# Altium PCB 105358-3LA003-01_EFM1_Touch.PcbDoc
Units mm, origin at the board's own origin, x right, y up, seen from the top; angles counter-clockwise.
Board outline 51.4 x 12.4 mm, 2 copper layers (Component Side, Bottom Layer), stack 1.179 mm thick; 1 components, 1 nets, 1 pads, 3 vias.
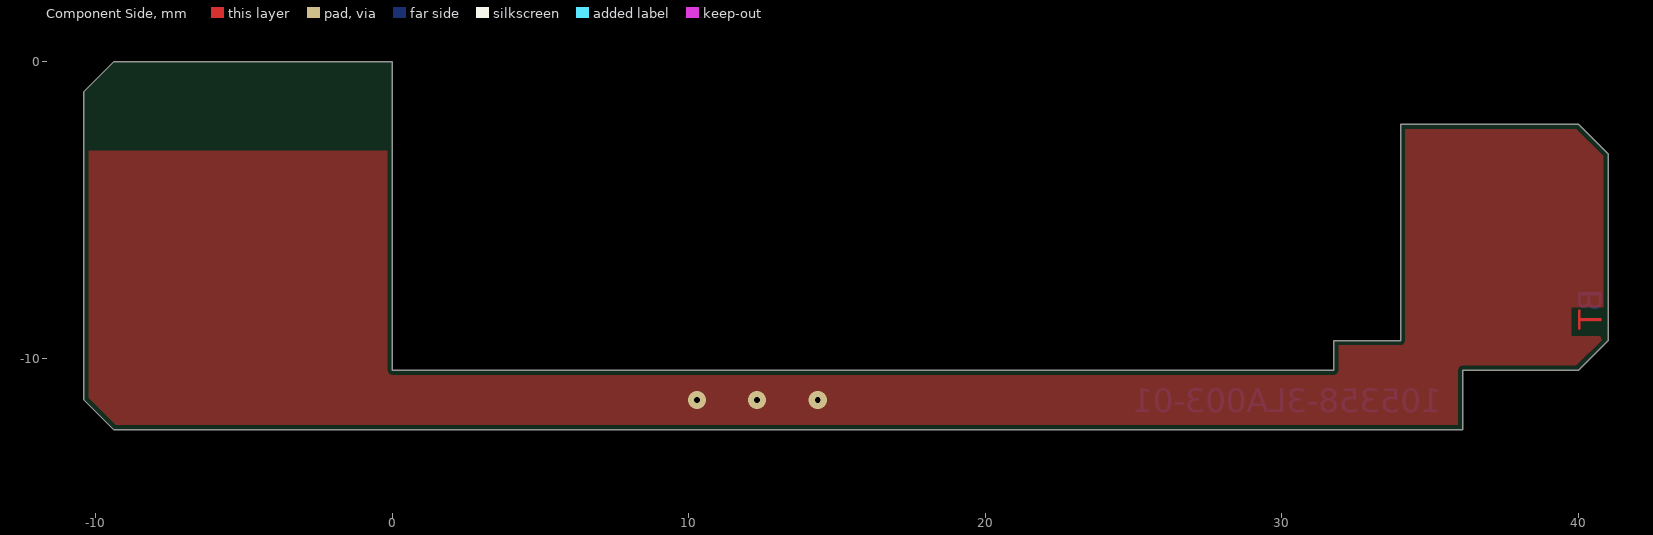
[diagram p0: Component Side view]
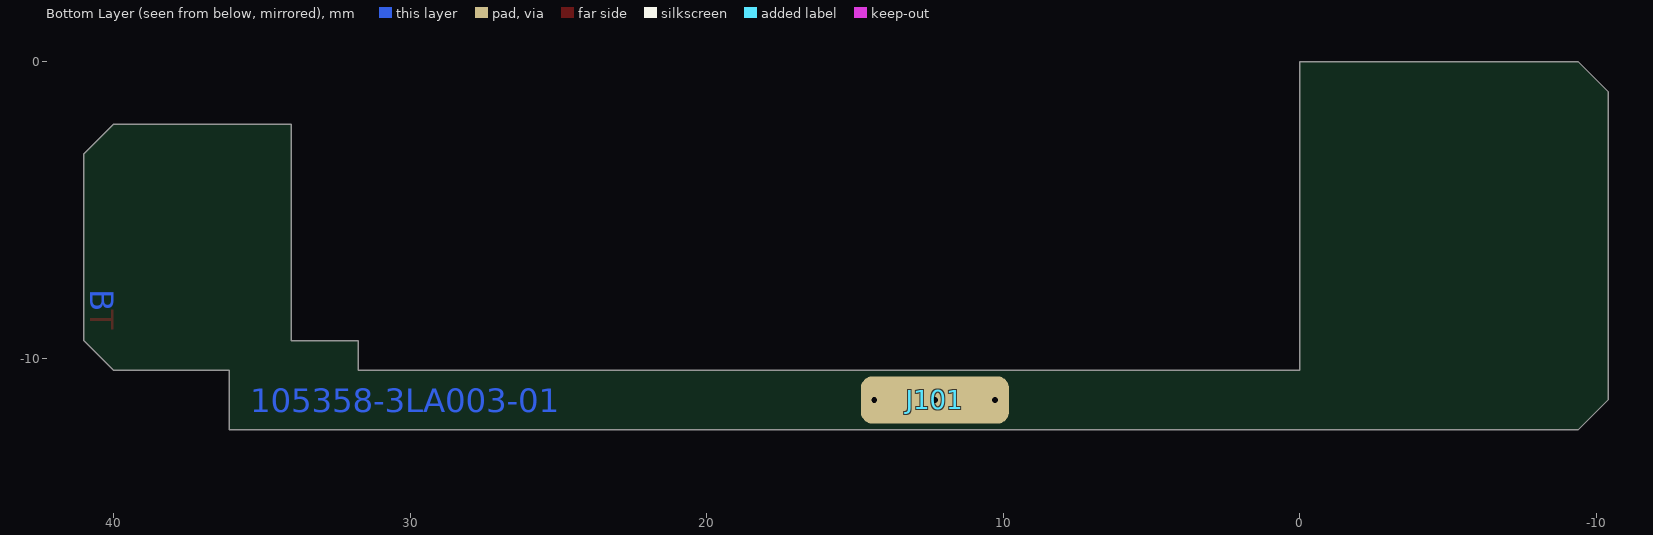
[diagram p1: Bottom Layer view, seen from below]

## Layer stack, top to bottom
Component Side: signal copper 0.0178
Dielectric 1: core 1.143, FR-4, Dk 4.2
Bottom Layer: signal copper 0.0178

## Board outline
36.1,-10.4 40,-10.4 41,-9.4 41,-3.1 40,-2.1 34,-2.1 34,-9.4 31.75,-9.4 31.75,-10.4 0,-10.4 0,0 -9.4,0 -10.4,-1 -10.4,-11.4 -9.4,-12.4 36.1,-12.4

## Design rules (kind name [scope] priority, off if disabled: settings)
AcuteAngle [All] p1: minimum=6.00000000000000E+0001 checktracksonly=FALSE
AssemblyTestpoint [(IsPad And (OnTopLayer Or OnBottomLayer)) Or (IsVia) Or (IsPad And OnMultiLayer)] p1: testpointundercomponent=TRUE minsize=0.8 maxsize=2.5 preferedsize=1 minholesize=0 maxholesize=2 preferedholesize=0.7 testpointgrid=0.025 usegrid=FALSE gridtolerance=0 allowsidebottom=TRUE minspacing=2.54
BoardOutlineClearance [All] p1: gap=0.15 ignorepadtopadclearanceinfootprint=FALSE
Clearance Clearance_FIDU [InComponentClass('FIDU')] p1: gap=0.2 ignorepadtopadclearanceinfootprint=FALSE except(0: Arc-Hole Track-Hole SMDPad-Hole THPad-Hole Via-Hole Fill-Hole Poly-Hole Region-Hole Text-Hole)
Clearance TRX_LINE_CLEARENCE [InNetClass('RF_50_Ohm')] p2: gap=0.4 ignorepadtopadclearanceinfootprint=FALSE except(0: Arc-Hole Track-Hole SMDPad-Hole THPad-Hole Via-Hole Fill-Hole Poly-Hole Region-Hole Text-Hole)
Clearance Clearance_4 [All] p3: gap=0.127 ignorepadtopadclearanceinfootprint=FALSE // All - All
Clearance Clearance_2 [InNetClass('Primary') vs InNetClass('Primary') or InNet('GND')] p4: gap=2.5 ignorepadtopadclearanceinfootprint=FALSE except(0: Arc-Hole Track-Hole SMDPad-Hole THPad-Hole Via-Hole Fill-Hole Poly-Hole Region-Hole Text-Hole) // Primary - Primary
Clearance Clearance_1 [OnLayer('Mid-Layer 1') or OnLayer('Multi-Layer') vs OnLayer('Mid-Layer 1')] p5: gap=0.4 ignorepadtopadclearanceinfootprint=FALSE except(0: Arc-Hole Track-Hole SMDPad-Hole THPad-Hole Via-Hole Fill-Hole Poly-Hole Region-Hole Text-Hole) // Inner Layers
Clearance Clearance_TP [InComponentClass('TP')] p6: gap=0.127 ignorepadtopadclearanceinfootprint=FALSE except(0: Arc-Hole Track-Hole SMDPad-Hole THPad-Hole Via-Hole Fill-Hole Poly-Hole Region-Hole Text-Hole; 0.2: Arc-Arc Arc-Track Arc-SMDPad Arc-THPad Arc-Via Arc-Fill Arc-Poly Arc-Region Track-Track Track-SMDPad Track-THPad Track-Via Track-Fill Track-Poly Track-Region THPad-THPad THPad-Via THPad-Fill THPad-Poly THPad-Region)
ComponentClearance [ALL and not( ( InComponentClass('NET_TIE') or InComponentClass('TP'))OR InComponentClass('FIDU')or InComponentClass('3D_IGNORE')or InComponent('D401'))] p1: gap=0.15 collisioncheckmode=3 verticalgap=0.1 showdistances=TRUE
DiffPairsRouting [All] p1: maxlimit=0.254 minlimit=0.2 mostfreqgap=0.2 toplayer_minwidth=0.127 toplayer_maxwidth=0.381 toplayer_prefwidth=0.2 bottomlayer_minwidth=0.127 bottomlayer_maxwidth=0.381 bottomlayer_prefwidth=0.2 maxuncoupledlength=12.7
FabricationTestPointUsage TestPointUsage [All] p1: valid=0 allowmultiple=FALSE
FabricationTestpoint Testpoint [(IsPad And (OnTopLayer Or OnBottomLayer)) Or (IsVia) Or (IsPad And OnMultiLayer)] p1: side=2 testpointundercomponent=TRUE minsize=0.8 maxsize=2.5 preferedsize=1 minholesize=0 maxholesize=2 preferedholesize=0.7 testpointgrid=2.54 allowsidebottom=TRUE usegrid=TRUE gridoriginx=109.725 gridoriginy=79.23 gridtolerance=0 minspacing=2.54
FanoutControl Fanout_Default [All] p1: bgadir=Out bgaviamode=Centered fanoutstyle=Auto fanoutdirection=Alternating viagrid=0.025 // Fanout_Default (Default Rule)
FanoutControl Fanout_Small [(CompPinCount < 5)] p2: bgadir=Out bgaviamode=Centered fanoutstyle=Auto fanoutdirection=OutThenIn viagrid=0.025 // Fanout_Small (Default Rule)
FanoutControl Fanout_LCC [IsLCC] p4: bgadir=Out bgaviamode=Centered fanoutstyle=Auto fanoutdirection=Alternating viagrid=0.025 // Fanout_LCC (Default Rule)
FanoutControl Fanout_BGA [IsBGA] p5: bgadir=Out bgaviamode=Centered fanoutstyle=Auto fanoutdirection=Alternating viagrid=0.025 // Fanout_BGA (Default Rule)
HoleSize [All] p1: absolutevalues=TRUE maxlimit=3.5 minlimit=0.1 maxpercent=80.000 minpercent=20.000
HoleToHoleClearance [All] p1: gap=0.127 allowstackedmicrovias=TRUE
MinimumAnnularRing MinimumAnnularRing_Uvia1 [InDrillLayerPair('Component Side - Inner Layer 1')] p1: minimumring=0.074
MinimumAnnularRing MinimumAnnularRing_Uvia2 [InDrillLayerPair('Inner Layer 2 - Solder Side')] p2: minimumring=0.074
MinimumAnnularRing MinimumAnnularRing_2 [isPad] p3: minimumring=0.2
MinimumAnnularRing MinimumAnnularRing_1 [isVia] p4: minimumring=0.125
MinimumSolderMaskSliver [All] p1: minsoldermaskwidth=0.06
MinimumSolderMaskSliver SilkscreenOverComponentPads [IsPad] p2: minsoldermaskwidth=0.075
PlaneClearance [All] p1: clearance=0.3
PlaneConnect PlaneConnect_VIA [isVia or HasFootprint('PAD PROGRAMMING')] p1: planeconnectstyle=Direct reliefexpansion=0.508 reliefentries=4 reliefconductorwidth=0.254 reliefairgap=0.254
PlaneConnect [All] p2: planeconnectstyle=Relief reliefexpansion=0.508 reliefentries=4 reliefconductorwidth=0.254 reliefairgap=0.254
PolygonConnect PolygonConnect_NO-Thermal [All vs IsNamedPolygon('NETC303_1_5VIN') or  IsNamedPolygon('Solder Side-VCC_SYS') or IsNamedPolygon('CC-3V_CAPS') or  IsNamedPolygon('Ss-5V_USB_IN_2') or IsNamedPolygon('SS-NetC307_2') or IsNamedPolygon('SS-GND_SB03') or IsNamedPolygon('Component Side-NetC307_2') or IsNamedPolygon('Solder Side-NetJ201_5') or  IsNamedPolygon('Component Side-NetJ201_5')or  IsNamedPolygon('Component Side-BLE_VDD_4')or IsNamedPolygon('SS-BLE_VDD_4')or IsNamedPolygon('SS-GND_9VRED')] p1: connectstyle=Direct reliefconductorwidth=0.254 reliefentries=4 polygonreliefangle="90 Angle" airgapwidth=0.254
PolygonConnect PolygonConnect_VIA [IsVia] p2: connectstyle=Direct reliefconductorwidth=0.254 reliefentries=4 polygonreliefangle="90 Angle" airgapwidth=0.254
PolygonConnect NET_TIE [InComponentClass('NET_TIE')] p3: connectstyle=Direct reliefconductorwidth=0.254 reliefentries=4 polygonreliefangle="90 Angle" airgapwidth=0.254
PolygonConnect PolygonConnect_TP_I [HasFootprint('TESTPOINT_C_R0608')or HasFootprint('TESTPOINT_C_R0402')OR HasFootprint('PAD PROGRAMMING')] p4: connectstyle=Direct reliefconductorwidth=0.254 reliefentries=4 polygonreliefangle="90 Angle" airgapwidth=0.254
PolygonConnect [All] p5: connectstyle=Relief reliefconductorwidth=0.254 reliefentries=4 polygonreliefangle="90 Angle" airgapwidth=0.254
RoutingVias [((StartLayer = 'Component Side') and (StopLayer = 'Solder Side' )) or ((StartLayer = 'Solder Side') and (StopLayer = 'Component Side' ))] p1: holewidth=0.15 width=0.401 viastyle="Through Hole" minholewidth=0.15 minwidth=0.4 maxholewidth=0.2 maxwidth=0.61
RoutingVias Microvia [((StartLayer = 'Component Side') and (StopLayer = 'Inner Layer 1' )) or  ((StartLayer = 'Inner Layer 2'  ) and (StopLayer = 'Solder Side')) or ((StartLayer = 'Inner Layer 1') and (StopLayer = 'Component Side'  )) or ((StartLayer = 'Solder Side' ) and (StopLayer = 'Inner Layer 2'))] p2: holewidth=0.1 width=0.31 viastyle="Through Hole" minholewidth=0.1 minwidth=0.25 maxholewidth=0.15 maxwidth=0.45
RoutingVias BuriedVia [((StartLayer = 'Inner Layer 1') and (StopLayer = 'Inner Layer 2' )) or  ((StartLayer = 'Inner Layer 2') and (StopLayer = 'Inner Layer 1' ))] p3: holewidth=0.15 width=0.401 viastyle="Through Hole" minholewidth=0.15 minwidth=0.401 maxholewidth=0.2 maxwidth=0.61
SilkToSilkClearance [All] p1: silktosilkclearance=0
SilkToSolderMaskClearance SilkscreenOverComponentPads_1 [IsPad] p1: minsilkscreentomaskgap=0 clearancetoexposedcopper=TRUE
SolderMaskExpansion SolderMaskExpansion_2 [All] p1: expansion=0.1
SolderMaskExpansion SolderMaskExpansion_1 [isVia And Not TestpointBottom] p2: expansion=-0.508
Width [All] p1: maxlimit=5 minlimit=0.127 preferedwidth=0.2
14 further rules are at their usual default settings.

## Components (designator, comment, footprint, x,y, rotation, side; value= is the part's Value field where it differs from the comment)
J101 "COMPONENT_1" PCBCOMPONENT_1 22.701,-11.401 r0 top

## Footprints (in the part's own frame and the unit in brackets; to place one, negate y for a bottom-side part, rotate by r counter-clockwise, add the part's x,y. Pads: shape width x height; smd on the part's side, far side on the other; paste and mask are expansions set on the pad)
PCBCOMPONENT_1 [mm]
  rrect50% 5x1.6 smd far side: 1(-10.401,0)

## Via types
v1: diameter 0.61, hole 0.2, Component Side to Bottom Layer, tented both sides, 3 vias

## Nets (pads, with @x,y where several pads share a name; then routed paths per layer and width w, separated by ;. In a path a pad name is that pad's centre, name@x,y a point inside that pad or via, vN(x,y) a via of type N, cw(c..) or ccw(c..) an arc to the next point about the centre after c; other vN are vias at no path point)
Touch_from_Mini_1: J101.1
  other v1: 10.282,-11.401 12.3,-11.401 14.347,-11.401

## Polygon pours and split planes (outlines as drawn)
Touch_from_Mini_1 on Component Side "CS_Touch" (solid, pour order 44): 34,-2.1 40,-2.1 41,-3.1 41,-9.4 40,-10.4 36.1,-10.4 36.1,-12.4 -9.4,-12.4 -10.4,-11.4 -10.4,-2.999 0,-2.999 0,-10.4 31.75,-10.4 31.75,-9.4 34,-9.4

## Other copper
Component Side:
  text "T" at 40.788,-9.029 h0.8 r90
  text ".Layer_Name" at -20.367,-18.164 h1
Bottom Layer:
  text "B" at 40.788,-7.674 h0.8 r90
  text "105358-3LA003-01" at 35.399,-11.812 h0.8
  text ".Layer_Name" at 8.175,-18.16 h1

## Silkscreen, mask and mechanical layers (free items; w line width, h text height)
Drill Guide:
  text ".Layer_Name" at -20.367,-22.383 h1
Mechanical 1:
  the board outline again, w0.254
  text "Board Outline" at 15.628,-18.16 h1
Mechanical 11:
  the board outline again, w0.254
Drill Drawing:
  text ".Layer_Name" at 33.628,-18.16 h1